# Altium PCB PC110.PcbDoc (part 15 of 24)
Units mm, origin at the board's own origin, x right, y up, seen from the top; angles counter-clockwise.
Board outline 150.05 x 107.35 mm, 10 copper layers (In2.Cu, F.Cu, B.Cu, In1.Cu, In3.Cu, In4.Cu, In5.Cu, In6.Cu, In7.Cu, In8.Cu); 936 components, 1434 nets, 4891 pads, 6088 vias.
Unrouted connection lines stored in the file: 2995.
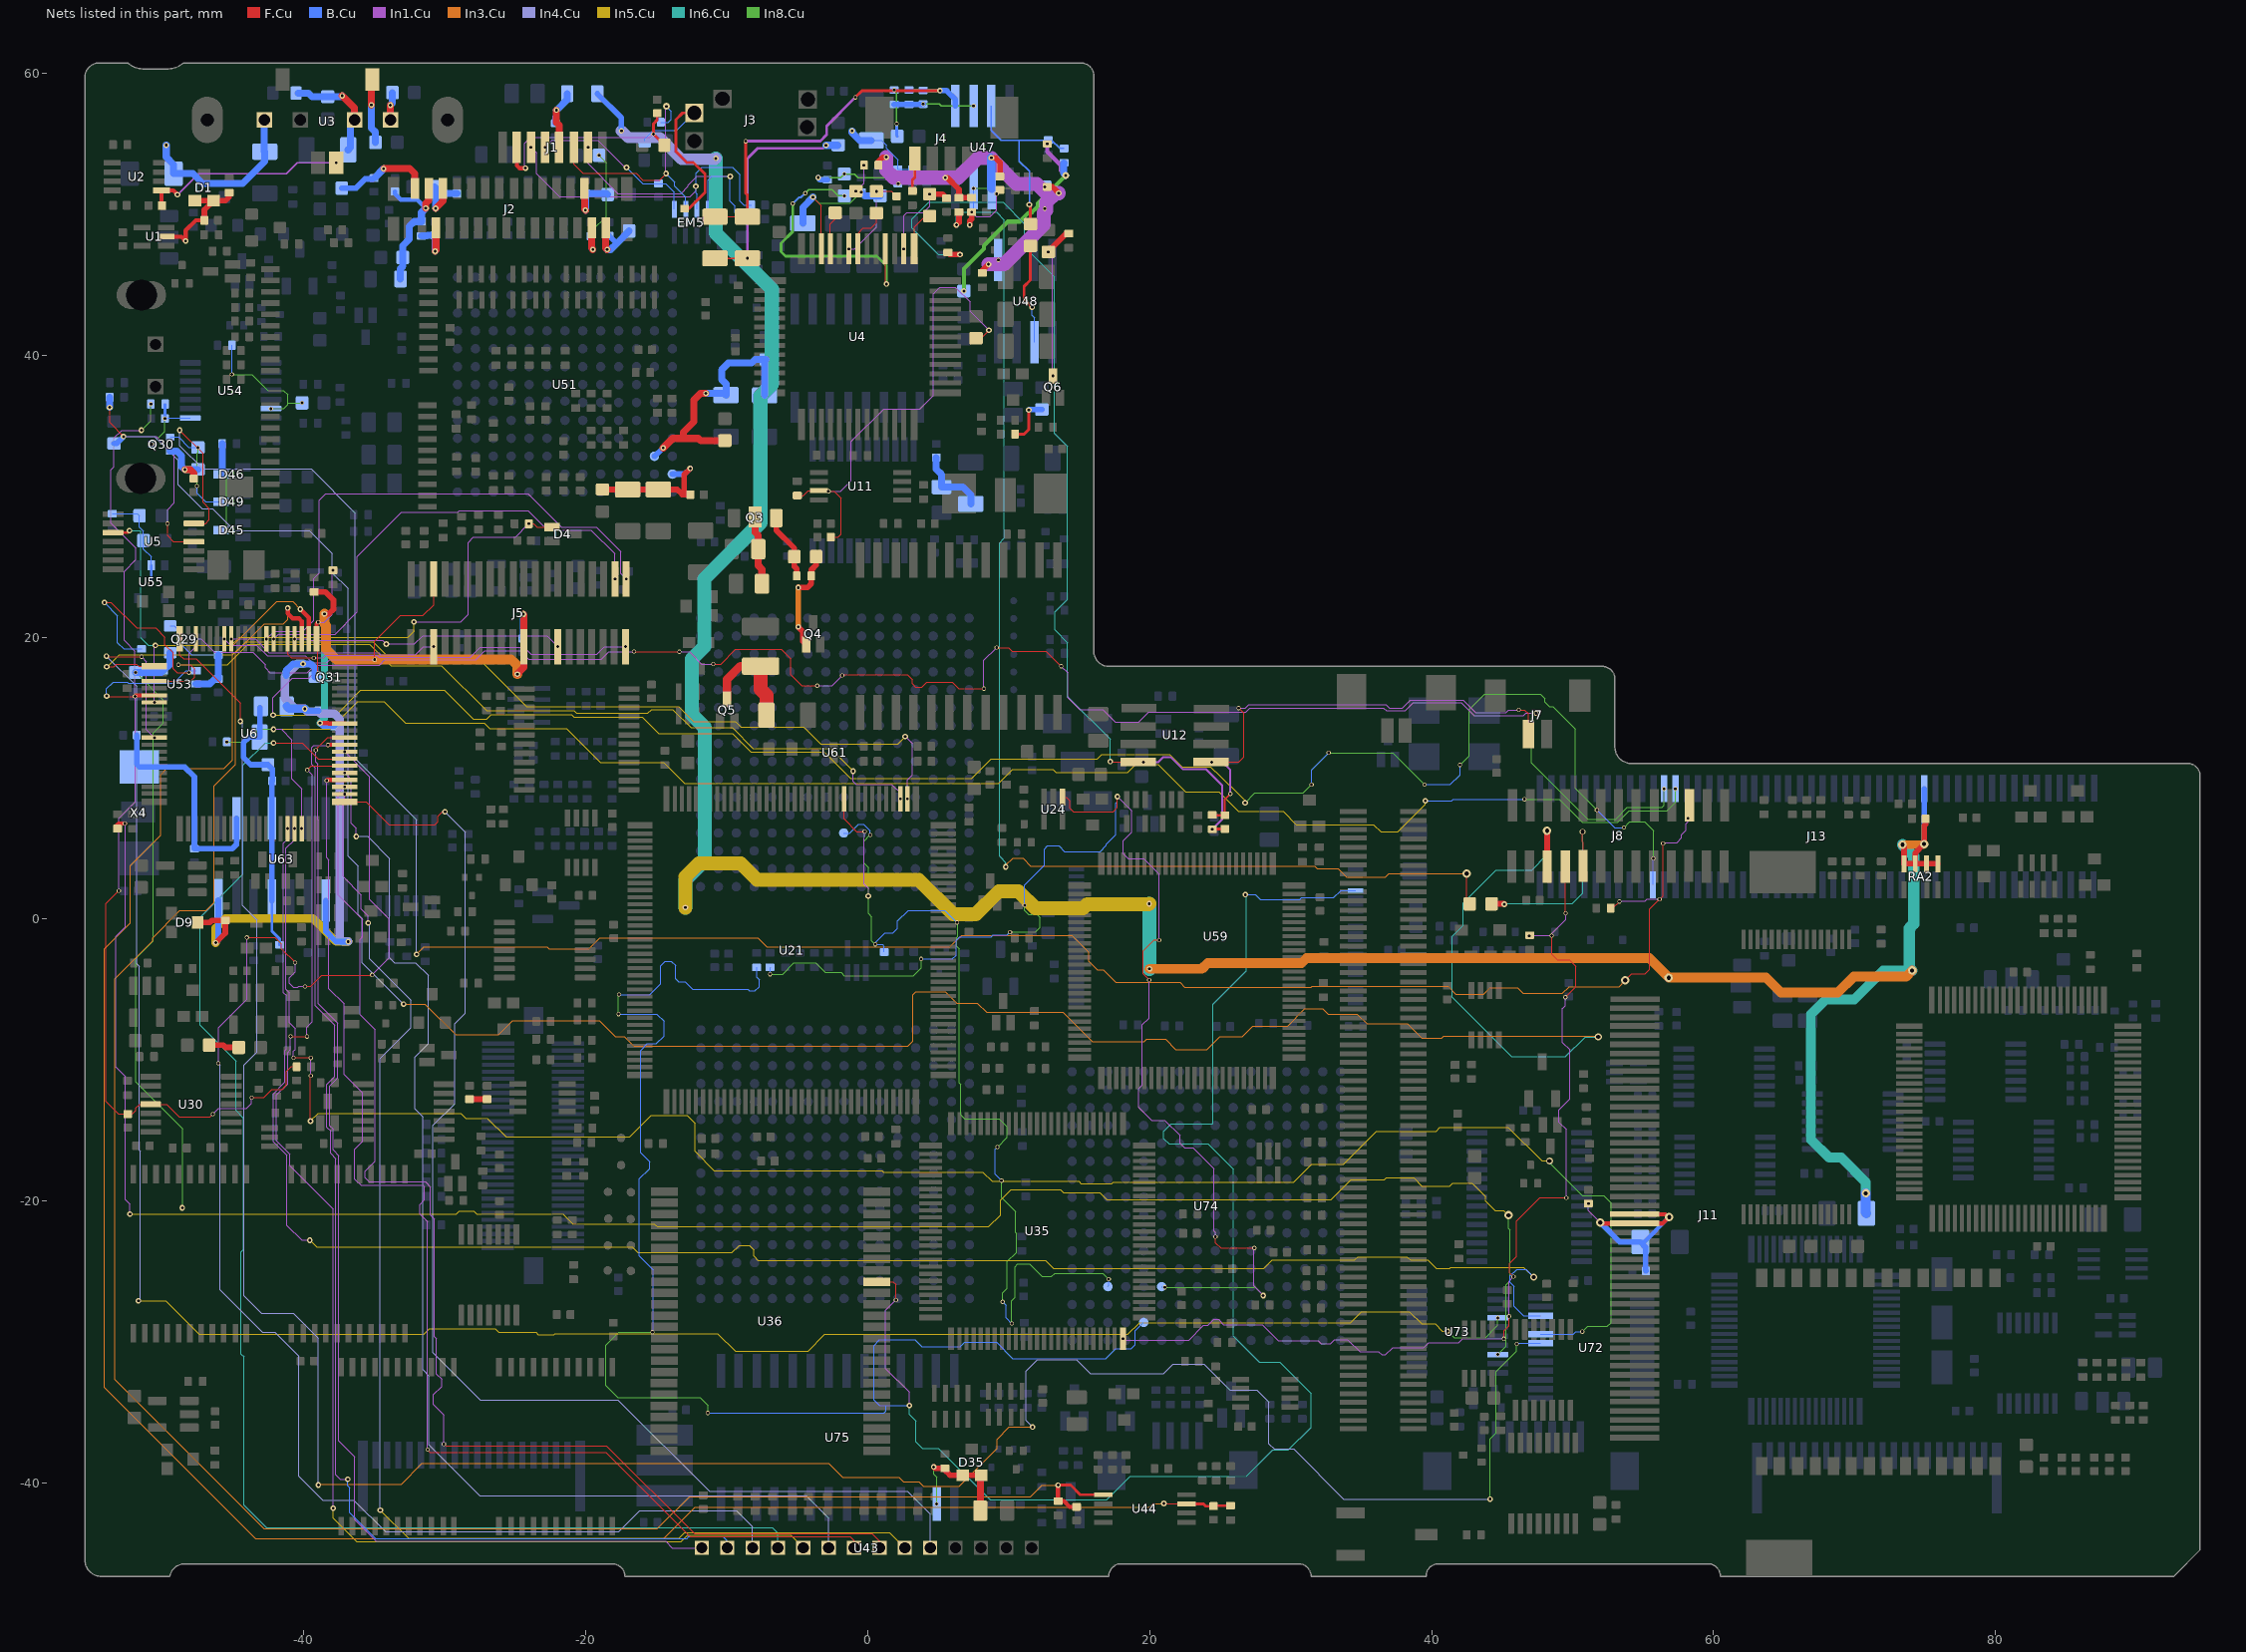
[diagram p22: the nets of this part, all layers, seen from the top]

## Via types
v1: diameter 0.3, hole 0.2, B.Cu to In8.Cu, tented both sides, 1934 vias
v2: diameter 0.4, hole 0.2, F.Cu to B.Cu, tented both sides, 1902 vias
v3: diameter 0.3, hole 0.2, F.Cu to In1.Cu, tented both sides, 1729 vias
v4: diameter 0.6, hole 0.3, F.Cu to B.Cu, tented both sides, 354 vias
v5: diameter 0.5, hole 0.3, F.Cu to B.Cu, tented both sides, 136 vias
v6: diameter 0.4, hole 0.2, B.Cu to In8.Cu, tented both sides, 12 vias
v7: diameter 0.3, hole 0.2, F.Cu to B.Cu, tented both sides, 6 vias
v8: diameter 0.6, hole 0.2, F.Cu to B.Cu, tented both sides, 4 vias
v9: diameter 0.5, hole 0.2, B.Cu to In8.Cu, tented both sides, 3 vias
v10: diameter 0.5, hole 0.2, F.Cu to B.Cu, tented both sides, 2 vias
v11: diameter 0.4, hole 0.3, F.Cu to B.Cu, tented both sides, 2 vias
v12: diameter 0.3, hole 0.2, F.Cu to In4.Cu, tented both sides, 2 vias
v13: diameter 0.6, hole 0.3, B.Cu to In8.Cu, tented both sides, 1 vias
v14: diameter 0.3, hole 0.2, F.Cu to In3.Cu, tented both sides, 1 vias

## Nets (pads, with @x,y where several pads share a name; then routed paths per layer and width w, separated by ;. In a path a pad name is that pad's centre, name@x,y a point inside that pad or via, vN(x,y) a via of type N, cw(c..) or ccw(c..) an arc to the next point about the centre after c; other vN are vias at no path point) (continued)
M38_P22_R88: R89.1 U73.8 | length 142
  F.Cu w0.3: R89.1@-53.22,6.43 -53.22,6.71 -53.14,6.79 v3(-52.7,6.79)
  F.Cu w0.4: R89.1@-53.17,6.46 R89.1@-53.15,6.48
  In1.Cu w0.08: v3(-52.7,6.79) -52.66,6.75 -52.66,-0.55 -53.34,-1.23 -53.34,-10.48 -52.65,-11.17 -52.65,-19.89 -52.33,-20.21 v2(-52.33,-20.92)
  In5.Cu w0.08: v2(-52.33,-20.92) -29.19,-20.92 -28.98,-20.71 -27.94,-20.71 -27.74,-20.91 -21.61,-20.91 -20.9,-21.62 -15.13,-21.62 -14.95,-21.8 8.59,-21.8 9.42,-20.97 9.42,-19.94 10.17,-19.19 13.66,-19.19 13.87,-19.4 16.47,-19.4 16.97,-19.9 32.87,-19.9 34.28,-18.49 36.64,-18.49 36.78,-18.35 38.72,-18.35 39.29,-18.92 41.29,-18.92 41.49,-18.72 42.86,-18.72 43.82,-19.68 43.82,-19.99 44.49,-20.66 45.11,-20.66 v4(45.45,-21)
  In8.Cu w0.08: v1(44.692,-30.875) 45.27,-30.298 45.27,-25.93 45.56,-25.64 45.56,-22.03 45.47,-21.94 45.47,-21.02 v4(45.45,-21)
M38_P27_KB_SPKDN: U6.31 U73.4 | length 156.5
  F.Cu w0.08: v2(-54,18.66) -53.95,18.61 v3(-51.51,18.61)
  In1.Cu w0.08: v3(-51.51,18.61) -51.16,18.26 -51.16,13.44 v3(-50.6,12.88)
  In4.Cu w0.08: v2(-54,18.66) -51.86,16.52 -51.86,-3.16 -51.67,-3.35 -51.67,-16.4 -51.6,-16.47 -51.6,-26.94 v2(-51.73,-27.07)
  In5.Cu w0.08: v2(-51.73,-27.07) -49.81,-27.07 -47.43,-29.45 -31.49,-29.45 -31.09,-29.05 -26.42,-29.05 -26.16,-29.31 -23.53,-29.31 -23.38,-29.46 -22.25,-29.46 -22.18,-29.39 -10.64,-29.39 -9.4,-30.63 -4.22,-30.63 -3.04,-29.45 18.45,-29.45 19.28,-28.62 34.24,-28.62 35.02,-27.84 38.43,-27.84 39.29,-28.7 40.24,-28.7 40.76,-29.22 v2(41.14,-29.22)
  In8.Cu w0.08: v2(41.14,-29.22) 41.59,-29.67 43.82,-29.67 44.692,-28.797 v1(44.692,-28.275)
M38_P34: J13.38 R356.1 U6.58 | length 120.6
  In1.Cu w0.08: v2(-42.15,13.47) -41.61,13.47 -40.86,12.72 -40.86,9.95 -40.15,9.24 v3(-40.15,6.43)
  In5.Cu w0.08: v2(-42.15,13.47) -38.12,13.47 -36.17,15.42 -34.32,15.42 -32.8,13.9 -27.2,13.9 -26.82,13.52 -21.36,13.52 -18.97,11.13 -14.49,11.13 -12.99,9.63 9.29,9.63 10.29,10.63 13.13,10.63 13.34,10.42 18.44,10.42 19,10.98 20.61,10.98 22.54,9.05 24.91,9.05 26.3,7.66 29.46,7.66 30.41,6.71 35.88,6.71 36.4,6.19 37.6,6.19 39.55,8.14 v2(39.55,8.4)
  In8.Cu w0.08: v1(-45.46,12.57) -44.1,12.57 -43.2,13.47 v2(-42.15,13.47) ; v1(46.58,8.51) 49.05,8.51 50.68,6.88 53.2,6.88 54.01,7.69 56.69,7.69 57.29,8.29 v1(57.29,9.25)
  B.Cu w0.08: v2(39.55,8.4) 41.41,8.4 41.52,8.51 v1(46.58,8.51)
M38_P35: U6.57 U72.20 | length 137.3
  F.Cu w0.08: v3(-40.73,-9.83) -39.52,-9.83 v3(-39.51,-9.84) ; v2(-39.53,-14.32) -39.53,-11.12 v3(-39.51,-11.1)
  In1.Cu w0.08: v3(-40.73,-9.83) -40.73,-9.37 -40.62,-9.26 -40.62,-7.75 -41.03,-7.34 -41.03,-5.21 -41.26,-4.98 -41.26,5.02 -40.65,5.63 v3(-40.65,6.43) ; v3(-39.51,-11.1) v3(-39.51,-9.84)
  In5.Cu w0.08: v2(-39.53,-14.32) -38.98,-13.77 -28.86,-13.77 -28.52,-14.11 -26.98,-14.11 -25.64,-15.45 -16.89,-15.45 -15.35,-13.91 -12.83,-13.91 -12.26,-14.48 -12.26,-16.47 -10.895,-17.835 0.995,-17.835 1.11,-17.95 8.17,-17.95 8.81,-18.59 14.96,-18.59 15.13,-18.76 17.31,-18.76 17.42,-18.65 30.21,-18.65 31.49,-17.37 33.75,-17.37 36.09,-15.03 40.31,-15.03 40.59,-14.75 45.43,-14.75 47.82,-17.14 v5(48.36,-17.14)
  In8.Cu w0.08: v5(48.36,-17.14) 48.36,-17.28 50.69,-19.61 52.21,-19.61 52.72,-20.12 52.72,-28.61 52.45,-28.88 51.06,-28.88 v1(50.69,-29.25)
  B.Cu w0.08: U72.20@47.73,-29.425 50.055,-29.425 50.23,-29.25 v1(50.69,-29.25)
M38_P36: U6.56 U72.22 | length 127.1
  In1.Cu w0.08: v3(-41.15,6.43) -41.15,5.68 -41.44,5.39 -41.44,-5.21 -41.25,-5.4 -41.25,-9.22 -41.35,-9.32 -41.35,-11.56 -42.17,-12.38 -42.17,-15.79 -41.21,-16.75 -41.21,-21.71 -40.15,-22.77 v2(-39.58,-22.77)
  In5.Cu w0.08: v2(-39.58,-22.77) -39.09,-23.26 -16.7,-23.26 -16.31,-23.65 -9.62,-23.65 -9.15,-23.18 -9.12,-23.18 -9.09,-23.15 -8.49,-23.15 -8.48,-23.14 -8.41,-23.14 -8.09,-23.46 -8.09,-23.88 -7.78,-24.19 12.6,-24.19 13.19,-24.78 28.08,-24.78 28.68,-24.18 34.52,-24.18 34.76,-23.94 38.25,-23.94 38.48,-24.17 39.73,-24.17 40.34,-24.78 41.27,-24.78 41.37,-24.68 46.53,-24.68 v5(47.24,-25.39)
  B.Cu w0.08: v5(47.24,-25.39) 46.69,-24.84 46.04,-24.84 45.57,-25.31 45.57,-25.77 45.84,-26.04 45.84,-27.458 46.507,-28.125 U72.22@47.73,-28.125
M38_P41: U6.23 U21.111 | length 62.1
  F.Cu w0.08: U6.23@-50.6,16.88 -48.06,16.88 -47.76,17.18 -47.76,17.75 -48.06,18.05 v7(-48.9,18.05)
  In1.Cu w0.08: v2(-1.04,10.5) -1.04,9.78 -0.83,9.57 1.7,9.57 2.32,8.95 v3(2.32,8.535)
  In5.Cu w0.08: v7(-48.9,18.05) -45.41,18.05 -43.95,19.51 -35.34,19.51 -33.82,17.99 -30.25,17.99 -27.04,14.78 -20.84,14.78 -20.67,14.61 -15.61,14.61 -15.34,14.88 -13.83,14.88 -12.53,13.58 -9.61,13.58 -8.13,12.1 -2.64,12.1 v2(-1.04,10.5)
M38_P43: U6.21 U21.110 | length 68.9
  F.Cu w0.08: v2(-53.99,17.91) -53.47,17.91 -53.3,18.08 -51.87,18.08 -51.72,17.93 U6.21@-50.6,17.93
  In1.Cu w0.08: v2(2.66,12.96) 3.17,12.45 3.17,10.22 2.82,9.87 v3(2.82,8.535)
  In5.Cu w0.08: v2(-53.99,17.91) -53.92,17.91 -53.09,18.74 -45.05,18.74 -44.11,19.68 -35.1,19.68 -33.86,18.44 -27.55,18.44 -24.19,15.08 -13.43,15.08 -12.37,14.02 -9.37,14.02 -8.99,13.64 -4.54,13.64 -3.33,12.43 2.13,12.43 v2(2.66,12.96)
M38_P44: U6.20 U72.19 | length 178.1
  F.Cu w0.08: U6.20@-48.8,19.88 -48.8,18.73 -48.54,18.47 -47.64,18.47 -44.5,15.33 v2(-44.5,14.04)
  In3.Cu w0.08: v2(-38.97,-40.13) -38.9,-40.06 -33.08,-40.06 -31.61,-38.59 -2.76,-38.59 -1.78,-39.57 2.22,-39.57 2.54,-39.89 3.62,-39.89 3.94,-40.21 6.49,-40.21 9.17,-37.53 9.17,-36.88 10.03,-36.02 v2(11.69,-36.02)
  In4.Cu w0.08: v2(-44.5,14.04) -44.35,13.89 -44.35,0.96 -43.34,-0.05 -43.34,-9.43 -44.25,-10.34 -44.25,-26.71 -43,-27.96 -40.74,-27.96 -38.97,-29.73 v2(-38.97,-40.13) ; v2(11.69,-36.02) 11.22,-35.55 11.22,-32.06 12.045,-31.235 14.805,-31.235 15.8,-32.23 20.98,-32.23 21.66,-31.55 23.85,-31.55 25.7,-33.4 27.61,-33.4 28.46,-34.25 28.46,-37.22 28.82,-37.58 30.21,-37.58 33.76,-41.13 v2(44.14,-41.13)
  In8.Cu w0.08: v2(44.14,-41.13) 44.14,-36.86 44.56,-36.44 44.56,-32.1 46.03,-30.63 v1(46.03,-30.13)
  B.Cu w0.08: v1(46.03,-30.13) 46.085,-30.075 U72.19@47.73,-30.075
M38_P46: J13.39 R288.2 U6.18 | length 140.9
  F.Cu w0.08: v2(-54.15,22.46) -54.14,22.47 -53.67,22.47 -51.85,20.65 -50.51,20.65 -49.85,19.99 -49.85,19.46 -49.28,18.89 -49.28,17.77 -49,17.49 v3(-48.14,17.49) ; v3(-16.57,18.98) -16.56,18.97 v3(-13.37,18.97) ; v3(-10.96,18.1) -10.42,18.1 -9.38,19.14 -6.14,19.14 -5.47,18.47 -5.47,17.34 -4.69,16.56 v3(-3.59,16.56) ; v3(-1.82,17.28) -1.75,17.35 2.8,17.35 3.16,16.99 3.16,16.69 3.38,16.47 3.85,16.47 4.18,16.8 6.01,16.8 6.46,16.35 v3(8.24,16.35) ; v3(9.14,19.26) 9.98,19.26 10.23,19.01 12.65,19.01 v3(13.72,17.94)
  In1.Cu w0.08: v3(-48.14,17.49) -48.14,18.86 -47.65,19.35 v3(-47.65,19.88) -47.29,19.88 -46.33,18.92 -43.62,18.92 -42.74,18.04 -42.74,17.82 -42.42,17.5 -39.74,17.5 -39.22,18.02 -34.63,18.02 -34.26,18.39 -27.81,18.39 -27.16,19.04 -24.67,19.04 -24.06,18.43 -18.9,18.43 -18.35,18.98 -16.63,18.98 v3@-16.59,19.02 ; v3(-13.37,18.97) -12.65,18.97 -11.78,18.1 v3(-10.96,18.1) ; v3(-3.59,16.56) -2.54,16.56 v3(-1.82,17.28) ; v3(8.24,16.35) 8.24,18.36 v3(9.14,19.26) ; v3(13.72,17.94) 14.19,17.47 14.19,15.73 15.06,14.86 16.68,14.86 17.57,13.97 19.22,13.97 19.93,14.68 26.81,14.68 27.11,14.98 36.59,14.98 36.79,14.78 38.12,14.78 38.71,15.37 42.09,15.37 43.02,14.44 46.5,14.44 46.69,14.63 47.38,14.63 v2(47.4,14.61)
  In8.Cu w0.08: v2(47.4,14.61) 47.07,14.28 47.07,11.1 51.08,7.09 53.04,7.09 53.87,7.92 56.33,7.92 56.49,8.08 v1(56.49,9.25)
  B.Cu w0.08: v2(-54.15,22.46) -53.22,21.53 -53.22,19.62 -52.77,19.17 R288.2@-51.5,19.17
M38_P52: J5.18 U6.14 | length 19.9
  F.Cu w0.08: v3(-34.98,18.41) -34.98,19.7 -33.14,21.54 -31.54,21.54 -30.78,22.3 J5.18@-30.78,24.13
  In1.Cu w0.08: v3(-45.65,19.88) -45.2,19.43 -43.35,19.43 -42.59,18.67 -39.89,18.67 -39.41,18.19 -38.37,18.19 -38.15,18.41 v3(-34.98,18.41)
M38_P53: J5.23 U6.13 | length 15.1
  In1.Cu w0.08: v3(-45.15,19.88) -43.44,19.88 -42.47,18.91 -34.68,18.91 -34.54,18.77 -32.08,18.77 -31.52,19.33 v3(-30.78,19.33)
M38_P60: J5.1 U6.8 | length 37.9
  In1.Cu w0.08: v3(-42.65,19.88) -42.1,20.43 -40.08,20.43 -39.31,21.2 -39.31,24.15 -38.92,24.54 -38.92,29.7 -38.46,30.16 -24.09,30.16 -21.74,27.81 -19.26,27.81 -17.53,26.08 -17.53,24.53 v3(-17.13,24.13)
M38_P61: J5.2 U6.7 | length 33.4
  In1.Cu w0.08: v3(-42.15,19.88) -41.81,20.22 -37.79,20.22 -36.21,21.8 -36.21,25.73 -33.06,28.88 -29.09,28.88 -28.98,28.99 -24.09,28.99 -22.71,27.61 -19.62,27.61 -17.93,25.92 v3(-17.93,24.13)
M38_P63: J5.40 U6.5 | length 26
  F.Cu w0.08: U6.5@-41.15,19.88 -41.15,18.79 -40.89,18.53 v3(-39.3,18.53)
  In1.Cu w0.08: v3(-39.3,18.53) -38.64,18.53 -38.45,18.72 -34.79,18.72 -34.66,18.59 -28.18,18.59 -27.47,19.3 -24.38,19.3 -23.88,18.8 -19.2,18.8 -18.67,19.33 v3(-17.18,19.33)
M38_P64: J5.34 U6.4 | length 19.4
  In1.Cu w0.08: v3(-40.65,19.88) -39.83,19.88 -39.73,19.78 -34.43,19.78 -34.17,19.52 v2(-34.15,19.52) -32.15,19.52 -31.56,20.11 -22.76,20.11 v3(-21.98,19.33)
M38_P65: C137.2 R214.2 U6.3 U44.1 | length 143.2
  F.Cu w0.2: v2(13.5,-40.14) 14.39,-40.14 15.07,-40.82 U44.1@16.71,-40.82
  F.Cu w0.3: v2(-41.14,22.07) -41.14,21.69 -40.79,21.34 -40.34,21.34 -40.15,21.15 U6.3@-40.15,19.88 ; v2(13.5,-40.14) R214.2@13.5,-41.27 13.92,-41.27 14.33,-41.68 C137.2@14.81,-41.68
  In3.Cu w0.08: v2(-41.14,22.07) -41.14,21.28 -41.46,20.96 -42.79,20.96 -44.85,18.9 -44.85,10.96 -46.35,9.46 -46.35,1.19 -46.94,0.6 -48.79,0.6 -50.73,-1.34 -50.73,-1.55 -53.4,-4.22 -53.4,-32.66 -42.82,-43.24 -14.92,-43.24 -12.64,-40.96 11.56,-40.96 12.37,-40.15 13.49,-40.15 v2(13.5,-40.14)
M38_P66: C138.2 R212.2 U6.2 U44.7 | length 152.9
  F.Cu w0.08: v2(21,-41.44) 21.03,-41.47 U44.7@22.61,-41.47
  F.Cu w0.2: U44.7@22.61,-41.47 23.82,-41.47 23.98,-41.63 C138.2@24.53,-41.63 24.56,-41.6 R212.2@25.73,-41.6
  F.Cu w0.3: v2(-40.25,21.99) -39.65,21.39 U6.2@-39.65,19.88
  In3.Cu w0.08: v2(-40.25,21.99) -40.79,22.53 -41.92,22.53 -45.05,19.4 -45.05,11.3 -45.67,10.68 -49.71,10.68 -50.14,10.25 -50.14,5.94 -52.29,3.79 -52.29,-0.25 -54.14,-2.1 -54.14,-33.23 -43.43,-43.94 -14.48,-43.94 -12.24,-41.7 19.96,-41.7 20.22,-41.44 v2(21,-41.44)
M38_P67: J13.61 R60.2 U6.1 | length 135.7
  F.Cu w0.08: U6.1@-39.1,19.88 -39,19.78 v3(-39,17.45)
  F.Cu w0.3: U6.1@-39.1,19.88 -39.1,20.95 v3(-38.98,21.07)
  In1.Cu w0.08: v2(-42.18,14.48) -42.18,15.73 -40.81,17.1 -39.65,17.1 -39.3,17.45 v3(-39,17.45) ; v3(-38.98,21.07) -38.54,21.07 -37.99,21.62 -37.99,24.69 v3(-37.93,24.75)
  In5.Cu w0.08: v2(-42.18,14.48) -37.71,14.48 -35.96,16.23 -30.02,16.23 -27.99,14.2 -27.03,14.2 -26.72,14.51 -21.02,14.51 -20.83,14.32 -15.98,14.32 -14.82,13.16 -9.58,13.16 -8.27,11.85 -3.08,11.85 -1.22,9.99 7.37,9.99 8.75,11.37 16.27,11.37 16.6,11.7 21.4,11.7 22.29,10.81 24.3,10.81 24.62,10.49 24.67,10.49 26.77,8.39 v2(26.77,8.26)
  In8.Cu w0.08: v2(26.77,8.26) 27.46,8.95 30.88,8.95 v1(31.48,9.55) ; v1(32.69,11.8) 37.24,11.8 39.49,9.55 v1(39.5,9.55) ; v1(42.01,10.94) 42.65,11.58 42.65,14.86 43.76,15.97 47.72,15.97 48.04,15.65 48.04,15.39 48.35,15.08 48.6,15.08 50.18,13.5 50.18,9.29 v1(51.72,7.75) ; v1(53.64,6.5) 54.04,6.9 55.1,6.9 55.73,6.27 v1(55.73,4.32)
  B.Cu w0.08: v1(31.48,9.55) 31.48,10.59 v1(32.69,11.8) ; v1(39.5,9.55) 41.31,9.55 42.01,10.25 v1(42.01,10.94) ; v1(51.72,7.75) 52.97,6.5 v1(53.64,6.5) ; J13.61@55.69,2.45 55.69,4.28 v1(55.73,4.32)
M38_P71: D4.2 R44.2 U5.3 U6.26 | length 50.1
  F.Cu w0.08: v3(-24.04,28.05) -23.71,28.05 -23.47,27.81 D4.2@-22.39,27.81
  F.Cu w0.2: U5.3@-53.533,27.42 -52.51,27.42 v2(-52.37,27.56)
  In1.Cu w0.08: v3(-50.6,15.38) -50.6,19.35 v2(-50.53,19.42) ; v2(-32.19,21.09) -28.87,21.09 -28.35,21.61 -28.35,26.72 -27.97,27.1 -24.99,27.1 v3(-24.04,28.05)
  In5.Cu w0.08: v2(-50.53,19.42) -45.15,19.42 -44.58,19.99 -32.63,19.99 -32.17,20.45 -32.19,20.47 v2(-32.19,21.09)
  In6.Cu w0.08: v2(-52.37,27.56) -51.65,27.56 -51.58,27.49 -51.58,19.97 -51.03,19.42 v2(-50.53,19.42)
M38_RESET: C99.2 R81.1 R282.2 U6.25 U30.4 U53.1 | length 81.5
  F.Cu w0.08: v2(-53.99,15.83) -53.96,15.8 v3(-51.98,15.8) ; v3(-53.12,2.02) -54.04,1.1 -54.04,-12.92 -53.14,-13.82 C99.2@-52.49,-13.82 -52.17,-13.82 -51.91,-13.56 -51.91,-13.4 -51.63,-13.12 U30.4@-50.86,-13.12 -49.73,-13.12 -48.83,-14.02 -46.65,-14.02 v3(-46.45,-13.82) ; v3(-43.7,-12.65) -42.84,-12.65 -42.25,-12.06 -41.53,-12.06 -41.23,-11.76 -41.23,-10.79 -40.9,-10.46 R81.1@-40.51,-10.46
  F.Cu w0.3: v3(-51.98,15.8) -51.9,15.88 U6.25@-50.6,15.88
  In1.Cu w0.08: v3(-53.12,2.02) -53.12,7.17 -51.95,8.34 -51.95,15.77 v3(-51.98,15.8) -51.98,19.02 -52.74,19.78 -52.74,24.66 -51.9,25.5 -51.9,26.31 -53.67,28.08 -53.67,31.89 -53.47,32.09 -53.47,34.12 -52.91,34.68 v2(-51.52,34.68) ; v3(-46.45,-13.82) -46.05,-13.42 -44.07,-13.42 -43.7,-13.05 v3(-43.7,-12.65)
  In8.Cu w0.08: v2(-51.52,34.68) -50.85,35.35 v1(-50.85,36.54)
  B.Cu w0.08: v2(-53.99,15.83) -53.99,16.34 -53.51,16.82 -52.52,16.82 -52.43,16.73 -49.24,16.73 -48.34,17.63 U53.1@-47.65,17.63
M38_SEG0: U6.70 U43.1 | length 84.1
  F.Cu w0.08: v3(-39.15,11.99) -39.15,12.05 -38.32,12.88 U6.70@-37.1,12.88
  In1.Cu w0.08: v3@-39.15,11.98 -39.15,11.15 -39,11 -39,7.04 -38.99,7.03 -38.99,-6 -37.61,-7.38 -37.61,-11.27 -38.17,-11.83 -38.17,-14.64 -37.925,-14.885 -37.925,-16.365 -37.53,-16.76 -37.53,-37 -36.39,-38.14 -36.39,-42.58 -34.86,-44.11 -14.35,-44.11 -13.87,-44.59 U43.1@-11.77,-44.59
M38_SEG1: U6.69 U43.2 | length 86.8
  F.Cu w0.3: v3(-38.29,12.35) -38.26,12.38 U6.69@-37.1,12.38
  In1.Cu w0.08: v3(-38.29,12.35) -38.33,12.31 -39.3,12.31 -39.44,12.17 -39.44,10.98 -39.19,10.73 -39.19,-6.12 -37.81,-7.5 -37.81,-11.16 -38.36,-11.71 -38.36,-14.75 -38.11,-15 -38.11,-16.61 -37.73,-16.99 -37.73,-39.4 -37.41,-39.72 v2(-36.88,-39.72)
  B.Cu w0.08: v2(-36.88,-39.72) -36.88,-40.19 -36.75,-40.32 -36.75,-42.09 -34.92,-43.92 -12.83,-43.92 -12.69,-43.78 -10.25,-43.78 -9.97,-44.06 U43.2@-9.97,-44.59
M38_SEG2: U6.68 U43.3 | length 108.4
  F.Cu w0.08: v3(-44.04,-1.3) -42.04,-1.3 -41.59,-1.75 -41.59,-2.1 v3(-40.62,-3.07) ; v3(-39.91,-4.77) -39.52,-4.77 -38.72,-3.97 -35.17,-3.97 v3(-35.15,-3.95)
  In1.Cu w0.08: v12(-46.06,-10.22) -46.06,-7.7 -44.04,-5.68 v3(-44.04,-1.3) ; v3(-40.62,-3.07) -40.62,-3.73 -41.04,-4.15 -41.04,-4.54 -40.74,-4.84 -40.44,-4.84 -40.37,-4.77 v3(-39.91,-4.77) ; v3(-37.1,11.88) -35.33,10.11 -35.33,1.39 -33.94,0 -33.94,-2.74 v3(-35.15,-3.95)
  In4.Cu w0.08: v12(-46.06,-10.22) -45.95,-10.33 -45.95,-25.68 -45.95,-26.29 -42.93,-29.31 -42.04,-29.31 -40.35,-31 -40.35,-39.5 -38.65,-41.2 -36.46,-41.2 -34.22,-43.44 -17.67,-43.44 -16.17,-41.94 -9.31,-41.94 -8.17,-43.08 U43.3@-8.17,-44.59
M38_SEG3: U6.67 U43.4 | length 103.3
  F.Cu w0.08: v2(-42.15,12.5) -40.1,12.5 -38.98,11.38 U6.67@-37.1,11.38
  In6.Cu w0.08: v2(-42.15,12.5) -42.73,12.5 -44.3,10.93 -44.3,3.19 -47.36,0.13 -47.36,-7.51 -44.82,-10.05 -44.82,-13.56 -44.27,-14.11 -44.27,-23.44 -44.44,-23.61 -44.44,-30.84 -44.26,-31.02 -44.26,-41.55 -42.65,-43.16 -6.75,-43.16 -6.37,-43.54 U43.4@-6.37,-44.59
M38_SEG4: U6.66 U43.5 | length 94
  F.Cu w0.08: v3(-40.94,-8.31) -39.79,-8.31 v3(-39.78,-8.32) ; v3(-39.76,10.58) -39.46,10.88 U6.66@-37.1,10.88
  In1.Cu w0.08: v3(-40.94,-8.31) -40.94,-9.25 -41.15,-9.46 -41.15,-11.67 -41.96,-12.48 -41.96,-15.72 -41,-16.68 -41,-17.47 -37.91,-20.56 v2(-37.91,-41.77) ; v3(-39.78,-8.32) -39.78,-7.64 -39.4,-7.26 -39.4,10.22 v3(-39.76,10.58)
  In5.Cu w0.08: v2(-37.91,-41.77) -37.91,-42.49 -36.25,-44.15 -13.23,-44.15 -12.77,-43.69 -5.47,-43.69 U43.5@-4.57,-44.59
  In6.Cu w0.08: U43.5@-4.58,-44.59 U43.5@-4.57,-44.59
M38_SEG5: U6.65 U43.6 | length 84.9
  In1.Cu w0.08: v3(-37.1,10.38) -36.63,9.91 -36.63,6.81 -36.28,6.46 v2(-36.28,5.87)
  In4.Cu w0.08: v2(-36.28,5.87) -35.48,5.87 -33.91,4.3 -33.91,-2.73 -33.55,-3.09 -32.07,-3.09 -31.18,-3.98 -31.18,-8.83 -32.12,-9.77 -32.12,-13.45 -31.56,-14.01 -31.56,-31.96 -31.13,-32.39 -31.13,-37.28 -27.52,-40.89 -4.35,-40.89 -2.77,-42.47 U43.6@-2.77,-44.59
M38_SEG6: U6.64 U43.7 | length 88.5
  F.Cu w0.08: v3(-31.22,-37.62) -31.04,-37.8 -18.59,-37.8 -12.59,-43.8 -1.24,-43.8 -0.97,-44.07 U43.7@-0.97,-44.59
  F.Cu w0.3: v3(-38.38,9.83) -38.33,9.88 U6.64@-37.1,9.88
  In1.Cu w0.08: v3(-38.38,9.83) -38.38,4.36 -38.22,4.2 -38.22,-4.94 -37.15,-6.01 -37.15,-11.01 -35.83,-12.33 -35.83,-15.74 -36.4,-16.31 -36.4,-18.43 -35.95,-18.88 -31.56,-18.88 -31.43,-19.01 -31.43,-19.89 -31.78,-20.24 -31.78,-20.9 -31.22,-21.46 v3(-31.22,-37.62)
M38_SEG7: U6.63 U43.8 | length 87.7
  F.Cu w0.08: v3(-30.07,-37.23) -30.03,-37.23 -29.91,-37.35 -18.53,-37.35 -12.29,-43.59 0.31,-43.59 0.83,-44.11 U43.8@0.83,-44.59
  In1.Cu w0.08: v3(-37.1,9.38) -37.55,8.93 -37.55,1.71 -35.82,-0.02 -35.82,-1.23 -36.01,-1.42 -36.01,-6.77 -34.94,-7.84 -34.94,-17.15 -35.65,-17.86 -35.65,-18.34 -35.36,-18.63 -31.39,-18.63 -31.03,-18.99 -31.03,-20.97 -30.73,-21.27 -30.73,-29.6 -30.59,-29.74 -30.59,-32.25 -30.21,-32.63 -30.21,-33.14 -30.8,-33.73 -30.8,-34.43 -30.07,-35.16 v3(-30.07,-37.23)
M38_SEG8: U6.62 U43.9 | length 92.4
  In1.Cu w0.08: v3(-37.1,8.88) -37.1,8.3 -37.22,8.18 -37.22,3.02 -35.92,1.72 -35.92,0.73 -35.43,0.24 v2(-35.43,-0.27)
  In4.Cu w0.08: v2(-35.43,-0.27) -35.34,-0.36 -35.34,-2.81 -32.4,-5.75 -32.4,-7.69 -34.58,-9.87 v2(-34.58,-41.91)
  In5.Cu w0.08: v2(-34.58,-41.91) -32.59,-43.9 -13.45,-43.9 -13.44,-43.89 -13.39,-43.89 -13,-43.5 1.54,-43.5 U43.9@2.63,-44.59
M38_SEG9: U6.61 U43.10 | length 90.7
  F.Cu w0.08: U6.61@-37.1,8.33 -35.58,8.33 -33.95,6.7 -30.71,6.7 -30.5,6.91 -30.5,7.29 -30.17,7.62 v2(-29.99,7.62)
  In4.Cu w0.08: v2(-29.99,7.62) -28.54,6.17 -28.54,-6.67 -29.29,-7.42 -29.29,-13.09 -30.83,-14.63 -30.83,-30.74 -27.48,-34.09 -17.72,-34.09 -11.22,-40.59 2.82,-40.59 4.43,-42.2 U43.10@4.43,-44.59
M38_VREF: C216.1 C223.2 J5.31 R41.1 U6.72 | length 37.3
  F.Cu w0.3: v2(-38.85,13.91) -38.27,13.91 -38.24,13.88 U6.72@-37.1,13.88
  F.Cu w0.4: R41.1@-39.27,23.21 -38.47,23.21 -37.9,22.64 -37.9,21.97 -38.21,21.66 v2(-38.53,21.66)
  F.Cu w0.5: v2(-24.85,17.38) -24.85,17.4 -24.38,17.87 J5.31@-24.38,19.33 -24.38,21.6 v2(-24.42,21.64)
  In3.Cu w0.7: v2(-38.53,21.66) -38.53,20.95 -38.41,20.83 -38.43,20.81 -38.43,19.14 -37.7,18.41 -25.27,18.41 -24.85,17.99 v2(-24.85,17.38)
  In6.Cu w0.5: v2(-38.85,13.91) -38.53,14.23 v2(-38.53,21.66)
  B.Cu w0.4: v2(-38.85,13.91) -38.63,13.69 C223.2@-37.83,13.69
  B.Cu w0.5: C216.1@-24.46,19.91 -24.42,19.95 v2(-24.42,21.64)
MEMCS16#: R316.2 U21.119 U61.J13 U74.D3 | length 72.6
  F.Cu w0.08: U21.119@-1.68,8.535 -1.68,7.11 -0.79,6.22 v3(-0.22,6.22)
  In1.Cu w0.08: v3(-0.22,6.22) -0.22,5.8 -0.26,5.76 -0.26,2.49 0.04,2.19 v2(0.04,1.64)
  In8.Cu w0.08: v1(0.18,5.98) -0.26,5.54 -0.26,3.96 0.04,3.66 v2(0.04,1.64) 0.04,0.4 0.28,0.16 0.28,-1.54 0.52,-1.78 v1(0.53,-1.78) ; v1(6.33,-0.23) 6.39,-0.29 6.39,-1.23 6.32,-1.3 6.32,-1.92 6.5,-2.1 6.5,-11.62 6.59,-11.71 6.59,-13.87 6.88,-14.16 9.33,-14.16 9.88,-14.71 9.88,-15.48 v1(9.2,-16.16) ; v1(9.49,-18.54) 9.49,-19.74 10.47,-20.72 10.47,-22.24 10.54,-22.31 10.54,-23.64 9.89,-24.29 9.89,-26.19 9.57,-26.51 v1(9.57,-27.14) ; v1(10.22,-28.68) 10.21,-28.67 10.21,-27.07 10.45,-26.83 10.45,-24.65 10.64,-24.46 11.47,-24.46 12.36,-25.35 13.04,-25.35 13.28,-25.11 16.67,-25.11 v1(17.09,-25.53)
  B.Cu w0.08: U61.J13@-1.71,6.11 -1.29,6.11 -0.65,6.75 -0.28,6.75 0.18,6.29 v1(0.18,5.98) ; R316.2@1.17,-2.33 1.17,-1.92 1.03,-1.78 v1(0.53,-1.78) 0.53,-1.69 1.24,-0.98 1.78,-0.98 2.12,-0.64 2.12,-0.13 2.88,0.63 5.47,0.63 v1(6.33,-0.23) ; v1(9.2,-16.16) 9.05,-16.31 9.05,-18.1 v1(9.49,-18.54) ; v1(9.57,-27.14) 9.81,-27.38 9.81,-28.27 v1(10.22,-28.68) ; U74.D3@17.03,-26.04 17.09,-25.98 v1(17.09,-25.53)
MEMR#: R322.1 U36.16 U59.24 U74.B5 | length 202.6
  F.Cu w0.08: U36.16@0.63,-25.71 1.8,-25.71 2,-25.91 v3(2,-27.01)
  In1.Cu w0.08: v3(2,-27.01) 1.27,-27.74 1.27,-31.86 2.96,-33.55 v2(2.96,-34.49)
  In6.Cu w0.08: v2(2.96,-34.49) 2.96,-35.11 3.42,-35.57 3.42,-37.06 3.89,-37.53 5.01,-37.53 8.67,-41.19 16.94,-41.19 18.62,-39.51 26.87,-39.51 28.74,-37.64 29.84,-37.64 31.44,-36.04 31.44,-33.64 29.21,-31.41 27.76,-31.41 25.93,-29.58 25.93,-17.72 24.15,-15.94 21.36,-15.94 20.99,-15.57 20.99,-15.05 21.51,-14.53 24.44,-14.53 24.5,-14.47 24.5,-6.02 26.85,-3.67 26.85,1.68 v2(26.79,1.74)
  In8.Cu w0.08: v1(-17.68,-6.73) -17.68,-5.38 v1(-17.64,-5.34) ; v1(-15.27,-29.29) -17.66,-29.29 -18.57,-30.2 -18.57,-33.09 -17.73,-33.93 -11.9,-33.93 -11.34,-34.49 v1(-11.34,-35.02)
  B.Cu w0.08: v1(-17.68,-6.73) -14.96,-6.73 -14.45,-7.24 -14.45,-8.3 -14.99,-8.84 -15.64,-8.84 -16.1,-9.3 -16.1,-16.58 -15.47,-17.21 -15.47,-17.68 -16.21,-18.42 -16.21,-23.87 -15.2,-24.88 -15.2,-29.22 v1(-15.27,-29.29) ; v1(-17.64,-5.34) -15.45,-5.34 -14.68,-4.57 -14.68,-3.3 -14.37,-2.99 -13.93,-2.99 -13.64,-3.28 -13.64,-4.23 -13.42,-4.45 -12.94,-4.45 -12.43,-4.96 -8.5,-4.96 -8.38,-5.08 -7.99,-5.08 -7.69,-4.78 -7.69,-4.31 -7.88,-4.12 R322.1@-7.88,-3.42 ; v1(-11.34,-35.02) 1.17,-35.02 1.3,-34.89 1.3,-34.49 1.32,-34.49 ; v2(2.96,-34.49) 1.32,-34.49 ; U74.B5@19.57,-28.58 18.96,-29.19 18.96,-30.17 18.68,-30.45 17.58,-30.45 16.87,-31.16 10.29,-31.16 9.14,-30.01 6.87,-30.01 6.55,-30.33 3.83,-30.33 3.34,-29.84 0.83,-29.84 0.43,-30.24 0.43,-34.1 0.82,-34.49 1.32,-34.49 ; v2(26.79,1.74) 27.5,1.74 27.86,1.38 30.63,1.38 30.79,1.54 33.06,1.54 33.56,2.04 U59.24@34.59,2.04
MEMW#: R324.1 U24.1 U74.D6 | length 96.5
  F.Cu w0.08: U24.1@13.81,8.65 14.11,8.65 14.35,8.41 14.35,7.87 14.59,7.63 17.42,7.63 17.71,7.92 v2(17.71,8.7) ; v3(19.96,-4.31) 19.54,-3.89 19.54,-2.25 20.31,-1.48 v3(20.67,-1.48) ; v3(24.67,-22.53) 24.67,-22.95 25.04,-23.32 v3(27.42,-23.32)
  In1.Cu w0.08: v2(17.71,8.7) 18.71,7.7 18.71,6.18 18.11,5.58 18.11,4.66 18.46,4.31 19.56,4.31 20.67,3.2 v3(20.67,-1.48) ; v3(19.96,-4.31) 19.96,-7.01 19.48,-7.49 19.48,-11.75 19.23,-12 19.23,-13.34 20.14,-14.25 21.07,-14.25 22.16,-15.34 22.16,-15.89 22.48,-16.21 23.08,-16.21 24.55,-17.68 24.55,-22.1 24.67,-22.22 v3(24.67,-22.53) ; v3(27.42,-23.32) 27.37,-23.37 27.37,-26.01 v2(28.05,-26.69)
  In8.Cu w0.08: v1(-6.92,-3.9) -6.04,-3.9 -5.24,-3.1 -3.69,-3.1 -3.02,-3.77 -1.9,-3.77 -1.66,-4.01 3.24,-4.01 3.79,-3.46 v1(3.79,-2.82) ; v1(10.09,-0.92) 11.9,-0.92 12.22,-0.6 12.22,0.12 11.99,0.35 11.4,0.35 11.13,0.62 v1(11.13,0.98) ; v1(21.07,-26.11) 27.5,-26.11 28.05,-26.66 v2(28.05,-26.69)
  B.Cu w0.08: R324.1@-6.94,-3.42 -6.92,-3.44 v1(-6.92,-3.9) ; v1(3.79,-2.82) 6.01,-2.82 6.28,-2.55 6.28,-1.52 6.54,-1.26 8.76,-1.26 8.9,-1.12 9.89,-1.12 v1(10.09,-0.92) ; v1(11.13,0.98) 11.13,2.43 12.52,3.82 12.52,4.97 12.75,5.2 13.55,5.2 13.95,4.8 16.48,4.8 16.92,5.24 16.92,5.31 17.61,6 17.61,8.23 17.71,8.33 v2(17.71,8.7) ; U74.D6@20.84,-26.07 20.88,-26.11 v1(21.07,-26.11) 20.91,-26.11 U74.D6@20.84,-26.04
MIC_in_pin: C6.2 J3.4 L13.2 | length 14.2
  F.Cu w0.2: C6.2@-12.99,50.4 -12.68,50.4 -11.54,51.54 -11.54,52.85 -12.37,53.68 -12.83,53.68 -13.62,54.47 -13.62,56.7 -13.13,57.19 J3.4@-12.3,57.19
  B.Cu w0.08: L13.2@-15.817,55.2 -15.817,55.363 -15.23,55.95 -13.54,55.95 J3.4@-12.3,57.19
MIC_J17: J4.1 R30.2 | length 2.4
  F.Cu w0.2: R30.2@3.17,51.65 3.17,52.43 3.34,52.6 J4.1@3.34,53.95
MN192_VSEN#: C226.2 J8.16 R277.2 U5.11 | length 195.2
  F.Cu w0.08: v2(-53.77,36.3) -53.77,35.22 -52.79,34.24 v2(-52.79,34.23) ; v3(-49.67,28.06) -49.67,27.19 -49.25,26.77 U5.11@-47.807,26.77
  F.Cu w0.4: J8.16@48.19,3.73 v4(48.19,6.28)
  In1.Cu w0.08: v2(-52.79,34.23) -50.48,34.23 -49.2,32.95 -49.2,29.53 -49.67,29.06 v3(-49.67,28.06)
  In3.Cu w0.08: v2(-32.92,-6.02) -31.4,-6.02 -29.23,-8.19 -26.18,-8.19 -25.18,-7.19 -19.02,-7.19 -17.89,-8.32 -17.27,-8.32 -16.58,-9.01 2.85,-9.01 3.21,-8.65 3.21,-5.34 3.41,-5.14 5.49,-5.14 6.3,-5.95 7.77,-5.95 8.42,-6.6 13.86,-6.6 15.93,-8.67 19.61,-8.67 19.78,-8.5 21.12,-8.5 21.85,-9.23 24.07,-9.23 24.99,-8.31 26.57,-8.31 27.31,-7.57 29.78,-7.57 31.01,-6.34 32.27,-6.34 32.66,-6.73 34.71,-6.73 35.4,-7.42 38.28,-7.42 39.29,-8.43 40.71,-8.43 40.86,-8.28 51.75,-8.28 v5(51.82,-8.35)
  In4.Cu w0.08: v2(-52.79,34.23) -50.62,34.23 -48.92,32.53 -48.92,30.81 -47.23,29.12 -46.47,29.12 -44.92,27.57 -39.61,27.57 -37.97,25.93 -37.97,24.55 -36.87,23.45 -36.87,4.46 -36.16,3.75 -36.16,0.35 -35.85,0.04 -35.85,-3.09 v2(-32.92,-6.02)
  In6.Cu w0.08: v4(48.19,6.28) 48.19,4.56 47.11,3.48 44.56,3.48 42.24,1.16 42.24,-0.44 41.47,-1.21 41.47,-5.55 45.66,-9.74 49.5,-9.74 50.89,-8.35 v5(51.82,-8.35)
  B.Cu w0.4: C226.2@-53.46,33.745 -53.275,33.745 v2(-52.79,34.23)
  B.Cu w0.5: v2(-53.77,36.3) R277.2@-53.77,37.03
MN195_U1RD#: J8.3 R128.2 U5.13 | length 166
  F.Cu w0.08: v2(-48.8,34.68) -47.16,33.04 -47.16,29.57 -46.72,29.13 -46.72,28.32 -46.97,28.07 U5.13@-47.807,28.07 ; R128.2@52.7,0.79 52.86,0.79 v3(53.33,1.26) ; v4(53.73,-4.34) 54.19,-3.88 55.15,-3.88 55.47,-3.56 55.47,0.72 v3(56.17,1.42) 56.41,1.66 v3(56.41,5.38) ; v3(58.18,7.16) 58.18,7.97 J8.3@58.29,8.08
  In1.Cu w0.08: v3(53.33,1.26) 53.36,1.29 55.15,1.29 55.28,1.42 v3(56.17,1.42) ; v3(56.41,5.38) 56.46,5.43 57.39,5.43 57.73,5.77 57.73,6 58.03,6.3 58.03,6.77 58.18,6.92 v3(58.18,7.16)
  In3.Cu w0.08: v2(-32,-2.49) -31.49,-1.98 -22.74,-1.98 -22.61,-2.11 -19.77,-2.11 -19,-1.34 -7.81,-1.34 -7.17,-1.98 5.83,-1.98 6.66,-1.15 14.47,-1.15 15.68,-2.36 15.68,-2.99 16.28,-3.59 16.71,-3.59 17.6,-4.48 22.14,-4.48 22.47,-4.81 31.47,-4.81 31.52,-4.76 41.17,-4.76 41.72,-5.31 43.68,-5.31 44.14,-4.85 46.08,-4.85 46.49,-5.26 49.27,-5.26 49.75,-4.78 53.29,-4.78 v4(53.73,-4.34)
  In4.Cu w0.08: v2(-48.8,34.68) -48.8,33.57 -47.16,31.93 -39.47,31.93 -36.35,28.81 -36.35,11.4 -32,7.05 v2(-32,-2.49)
Modem_Audio_Out: C89.1 R32.1 | length 87.5
  F.Cu w0.08: v4(42.49,3.24) 42.5,3.23 42.5,1.285 C89.1@42.695,1.09
  F.Cu w0.4: v2(6.29,49.24) 6.47,49.42 R32.1@6.47,50.15
  In3.Cu w0.08: v2(9.79,3.71) 9.79,3.82 10.31,4.34 11,4.34 11.56,3.78 31.69,3.78 31.89,3.58 33.37,3.58 33.97,2.98 36.71,2.98 36.97,3.24 v4(42.49,3.24)
  In6.Cu w0.08: v2(6.29,49.24) 6.29,49.8 6.65,50.16 9.13,50.16 9.69,49.6 9.69,27.03 9.34,26.68 9.34,4.47 9.79,4.02 v2(9.79,3.71)
Modem_VSDA#: J8.17 R127.1 U35.75 | length 70.6
  F.Cu w0.08: v3(45.12,-29.76) 45.12,-29.19 45.49,-28.82 v3(45.49,-28.17) ; v3(45.81,-25.35) 45.53,-25.07 45.53,-24.4 46.01,-23.92 46.01,-21.41 47.68,-19.74 49.54,-19.74 v3(49.56,-19.76) ; v3(46.91,-1.18) R127.1@46.95,-1.14 ; v3(48.52,-1.16) 48.52,-2.5 48.91,-2.89 49.78,-2.89 50.24,-3.35 50.24,-4.78 v3(49.49,-5.53) ; J8.17@49.49,3.73 49.49,0.45 v3(49.51,0.43)
  In1.Cu w0.08: v3(18.11,-29.75) 18.22,-29.86 22.78,-29.86 23.83,-28.81 24.13,-28.81 24.55,-28.39 24.86,-28.39 25.22,-28.75 27.99,-28.75 29.13,-29.89 31.95,-29.89 32.16,-30.1 32.84,-30.1 33.12,-29.82 34.05,-29.82 34.91,-30.68 36.24,-30.68 36.46,-30.9 36.72,-30.9 37.24,-30.38 39.45,-30.38 39.78,-30.05 41.91,-30.05 42.2,-29.76 v3(45.12,-29.76) ; v3(45.49,-28.17) 45.49,-25.67 v3(45.81,-25.35) ; v3(46.91,-1.18) 46.93,-1.16 v3(48.52,-1.16) 48.52,-1.01 49.51,-0.02 v3(49.51,0.43) ; v3(49.49,-5.53) 49.49,-6.13 49.3,-6.32 49.29,-6.32 49.29,-8.74 49.81,-9.26 49.81,-12.74 49.04,-13.51 49.04,-14.41 49.54,-14.91 49.54,-19.74 v3(49.56,-19.76)
Net-(C1--): C1.2 U2.1 U3.1 | length 14.6
  F.Cu w0.1: U3.1@-37.8,53.65 v3(-37.7,53.65)
  F.Cu w0.3: C1.2@-50.06,50.61 -50.09,50.64 U2.1@-50.09,51.69 -49.26,51.69 v2(-48.96,51.39)
  In1.Cu w0.1: v2(-48.96,51.39) -47.46,52.89 -41.235,52.89 -40.475,53.65 v3(-37.7,53.65)
Net-(C4-+): C4.1 D1.1 D1.3 R4.1 U1.2 | length 8.4
  F.Cu w0.3: U1.2@-49.76,48.41 -48.69,48.41 v2(-48.38,48.1) -48.38,48.85 -47.66,49.57 C4.1@-47.05,49.57
  F.Cu w0.4: D1.3@-47.73,50.955 D1.1@-46.405,50.955 ; C4.1@-47.05,49.57 -47.05,50.31 D1.1@-46.405,50.955 ; R4.1@-45.3,51.53 -45.3,51.22 -45.565,50.955 D1.1@-46.405,50.955
Net-(C7-+): C7.1 J1.7 L1.2 | length 15.9
  F.Cu w0.2: C7.1@-14.93,57.17 -14.93,56.69 -15.21,56.41 v3(-15.21,55.688) L1.2@-14.423,54.9
  F.Cu w0.3: J1.7@-24.89,54.75 -24.89,53.46 -24.7,53.27 v2(-24.28,53.27)
  In1.Cu w0.08: v2(-24.28,53.27) -24.33,53.32 -24.33,55.04 -23.91,55.46 -15.438,55.46 v3(-15.21,55.688)
Net-(C10-+): C10.1 C23.1 L7.1 | length 16.2
  F.Cu w0.1: C10.1@-10.84,46.875 v3(-8.54,46.875)
  In1.Cu w0.1: v3(-8.54,46.875) v3@-8.53,46.885
  In1.Cu w0.2: v3@-8.53,46.885 -8.53,53.96 -7.81,54.68 -3.17,54.68 v2(-2.96,54.89)
  B.Cu w0.1: L7.1@-2.113,54.89 L7.1@-2.1,54.903
  B.Cu w0.5: v2(-2.96,54.89) L7.1@-2.113,54.89
Net-(C10--): C10.2 C23.2 C154.2 R227.2 U47.1 | length 27.4
  F.Cu w0.08: C10.2@-10.84,49.825 C23.2@-8.54,49.825
  F.Cu w0.2: v3(-8.65,55.18) -8.66,55.17 -8.66,51.48 -8.54,51.36 C23.2@-8.54,49.825 ; v3(-0.88,58.29) -0.4,58.77 v2(5.12,58.77)
  In1.Cu w0.2: v3(-8.65,55.18) -8.64,55.19 -3.36,55.19 -2.91,55.64 -2.91,56.26 v3(-0.88,58.29)
  B.Cu w0.2: R227.2@2.93,58.81 2.96,58.78 C154.2@3.93,58.78 3.94,58.77 v2(5.12,58.77)
  B.Cu w0.4: v2(5.12,58.77) 5.59,58.77 6.21,58.15 U47.1@6.21,57.68
Net-(C11-+): C11.1 C50.2 R72.1 U11.7 | length 32.9
  F.Cu w0.08: R72.1@-5,30.05 -4.57,30.05 -4.23,30.39 U11.7@-3.46,30.39 -3.42,30.35 v3(-2.78,30.35) -2.4,30.35 -1.9,29.85 -1.9,27.3 -2.1,27.1 C50.2@-2.62,27.1 ; C11.1@7.68,41.205 8.035,41.205 v2(8.6,41.77)
  In1.Cu w0.08: v3(-2.78,30.35) -1.91,30.35 -1.17,31.09 -1.17,33.89 1.14,36.2 3.7,36.2 4.64,37.14 4.64,44.37 5.1,44.83 6.22,44.83 7.27,43.78 7.27,43.1 v2(8.6,41.77)
Net-(C12-+): C12.1 U4.1 | length 3
  F.Cu w0.08: U4.1@3.3,47.54 3.3,49.09 4.08,49.87 C12.1@4.39,49.87
Net-(C12--): C12.2 C24.2 U4.2 | length 6.6
  F.Cu w0.4: v3(4.39,51.42) 5.31,51.42 C24.2@5.59,51.14
  In1.Cu w0.08: v3(2.55,47.54) 2.55,49.9 2.78,50.13 3.95,50.13 4.39,50.57 v3(4.39,51.42)
Net-(C13-+): C13.1 U48.6 | length 7.3
  F.Cu w0.2: C13.1@11.54,47.755 11.54,45.33 11.09,44.88 11.09,43.97 v2(11.66,43.4)
  B.Cu w0.08: v2(11.66,43.4) 11.66,42.84 11.845,42.655 U48.6@11.845,40.91
Net-(C13--): C13.2 R217.2 R218.2 U47.3 | length 13.7
  F.Cu w0.1: v2(11.46,50.68) v2@11.54,50.6
  F.Cu w0.2: C13.2@11.54,49.305 v2@11.54,50.6
  B.Cu w0.1: U47.3@8.76,57.68 8.76,55.95 9.45,55.26 10.72,55.26 ; v2(11.46,50.68) 11.46,53.04 10.74,53.76 10.74,55.24 10.72,55.26 ; R217.2@13.92,54.66 13.62,54.66 13.02,55.26 R218.2@12.8,55.26 10.72,55.26
Net-(C15--): C15.2 R25.2 R26.2 R32.2 R34.2 R35.2 U47.6 | length 32.4
  F.Cu w0.4: R34.2@0.75,53.48 0.75,53.73 1.07,54.05 v2(1.32,54.05) ; v2(5.5,52.59) 5.64,52.59 6.47,51.76 R32.2@6.47,51.17 R25.2@7.37,51.17 ; R26.2@8.13,45.84 8.13,46.01 v2(8.57,46.45) ; v2(8.77,54) 9.05,54 9.38,53.67 C15.2@9.38,52.68 ; R35.2@12.73,51.94 13.11,51.94 v2(13.55,51.5)
  In1.Cu w1: v2(1.32,54.05) 1.32,53.13 1.86,52.59 v2(5.5,52.59) 6.4,52.59 7.81,54 v2(8.77,54) 8.77,53.94 10.55,52.16 12,52.16 12.66,51.5 v2(13.55,51.5) 13.34,51.5 12.67,50.83 12.67,50.27 12.49,50.09 12.49,49.27 9.67,46.45 v2(8.57,46.45)
  B.Cu w0.6: v2(8.77,54) 8.77,51.855 U47.6@8.795,51.83
Net-(C18--): C18.2 R34.1 | length 2.1
  In1.Cu w0.08: v3(-0.84,51.635) -0.27,52.205 v3(-0.27,53.48)
Net-(C20--): C20.2 C21.2 U4.8 | length 6.7
  F.Cu w0.08: v3(0.62,51.63) 1.69,51.63 C20.2@2.04,51.28
  In1.Cu w0.08: v3(-1.35,47.54) -0.92,47.54 0.62,49.08 v3(0.62,51.63)
Net-(C21-+): C21.1 U4.7 | length 3.4
  F.Cu w0.08: U4.7@-0.7,47.54 -0.7,48.64 -0.32,49.02 0.22,49.02 0.62,49.42 C21.1@0.62,50.08
Net-(C22-+): C22.1 U4.10 | length 2.7
  F.Cu w0.08: U4.10@-2.65,47.54 -2.65,49.31 -2.31,49.65 C22.1@-2.31,50.105
Net-(C25-+): C25.1 Q6.3 R36.2 | length 11
  F.Cu w0.08: v3(12.81,47.325) C25.1@12.945,47.325
  F.Cu w0.4: C25.1@12.945,47.325 12.945,47.495 14.09,48.64 R36.2@14.26,48.64
  In1.Cu w0.08: v3(12.81,47.325) 13.12,47.015 13.12,38.55 v3(13.14,38.53)
Net-(C30--): C30.2 C36.2 C48.1 L3.2 U51.N12 | length 9.9
  F.Cu w0.4: L3.2@-18.81,30.477 -18.808,30.475 C30.2@-17.03,30.475 C36.2@-14.86,30.475 -13.525,30.475 -13.16,30.11 -13.02,30.11 ; v2(-12.59,31.97) -13.02,31.54 -13.02,30.11 ; C48.1@-12.58,30.11 -13.02,30.11
  B.Cu w0.4: U51.N12@-13.86,31.57 -12.99,31.57 v2(-12.59,31.97)
Net-(C46-+): C46.1 Q3.3 R76.1 | length 4.7
  F.Cu w0.4: Q3.3@-6.493,28.45 -6.492,27.593 -5.205,26.305 C46.1@-5.205,25.71 -5.205,25.025 -5.03,24.85 R76.1@-5.03,24.35
Net-(C46--): C46.2 Q4.2 R76.2 | length 7.4
  F.Cu w0.4: v2(-4.93,20.73) -4.61,20.41 -4.61,19.72 Q4.2@-4.37,19.48 ; v2(-4.93,23.52) -4.28,23.52 -4.01,23.79 R76.2@-4.01,24.35 -4.01,24.77 -3.655,25.125 C46.2@-3.655,25.71
  In3.Cu w0.4: v2(-4.93,20.73) v2(-4.93,23.52)
Net-(C47-+): C47.1 L4.1 Q5.3 | length 7.8
  F.Cu w0.6: Q5.3@-9.97,15.59 -9.97,17.02 -9.04,17.95 L4.1@-7.6,17.95
  F.Cu w1: L4.1@-7.6,17.95 -7.6,16.3 -7.185,15.885 C47.1@-7.185,14.48
Net-(C49--): C49.2 Q3.2 R68.2 | length 4.9
  F.Cu w0.5: Q3.2@-7.993,28.537 -7.993,27.443 -7.76,27.21 C49.2@-7.76,26.24 -7.76,25.08 -7.508,24.827 R68.2@-7.508,23.8
Net-(C60-Pad1): C60.1 C63.2 | length 2.2
  F.Cu w0.4: C63.2@-46.715,-8.93 -45.72,-8.93 -45.56,-9.09 C60.1@-44.615,-9.09
Net-(C65-+): C65.1 C67.1 | length 1.3
  F.Cu w0.4: C67.1@-28.25,-12.77 C65.1@-27,-12.77
Net-(C85-+): C85.1 R24.1 R121.1 U12.4 | length 69.5
  F.Cu w0.08: v2(17.21,11.18) 17.23,11.16 U12.4@19.19,11.16 19.54,11.16 v3(19.56,11.14) ; v3(24.44,6.38) R121.1@24.47,6.41
  F.Cu w0.2: R121.1@24.47,6.41 C85.1@25.33,6.41
  F.Cu w0.4: R24.1@5.68,47.29 5.83,47.14 v2(6.54,47.14)
  In1.Cu w0.15: v3(19.56,11.14) 20.59,11.14 20.93,11.48 21.51,11.48 22.36,10.63 24.01,10.63 25.14,9.5 25.14,7.08 v3(24.44,6.38)
  In6.Cu w0.08: v2(6.54,47.14) 5.01,47.14 3.13,49.02 3.13,49.64 4.34,50.85 9.61,50.85 11.14,49.32 11.14,47.66 13.26,45.54 13.26,34.45 14.17,33.54 14.16,33.53 14.16,22.68 13.28,21.8 13.28,20.51 14.18,19.61 14.18,15.8 17.21,12.77 v2(17.21,11.18)
Net-(C85--): C85.2 J7.2 R121.2 U12.5 | length 34.9
  F.Cu w0.08: U12.5@24.34,11.16 26.33,11.16 26.67,11.5 26.67,14.61 v3(26.31,14.97) ; v3(46.18,14.84) 46.6,14.84 46.86,14.58 J7.2@46.86,13.14
  F.Cu w0.15: R121.2@24.44,7.4 24.47,7.37 C85.2@25.33,7.37 25.33,8.5 v3(25.72,8.89)
  In1.Cu w0.08: v3(26.31,14.97) 26.77,14.97 27.03,15.23 36.77,15.23 37.02,14.98 37.92,14.98 38.48,15.54 42.23,15.54 43.11,14.66 45.28,14.66 45.46,14.84 v3(46.18,14.84)
  In1.Cu w0.15: v3(24.41,11.14) 25.16,11.14 25.72,10.58 v3(25.72,8.89)
Net-(C89--): C89.2 J8.18 | length 13.6
  F.Cu w0.08: v11(50.7,6.2) 50.7,5.49 50.74,5.45 J8.18@50.74,3.78
  F.Cu w0.4: C89.2@44.245,1.09 45.12,1.09 v2(45.15,1.06)
  In6.Cu w0.08: v2(45.15,1.06) 45.2,1.11 49.97,1.11 50.71,1.85 50.71,6.19 v11(50.7,6.2)
Net-(C92--): C92.2 F3.1 J13.16 L12.1 RA2.1 RA2.2 RA2.3 RA2.4 | length 214.9
  F.Cu w0.4: v4(73.4,5.28) 73.505,5.175 RA2.4@73.505,3.94 RA2.3@74.305,3.94 ; C92.2@75.03,7.12 75.03,6.74 74.93,6.64 v4(74.93,5.33) 74.305,4.705 RA2.3@74.305,3.94 ; RA2.1@75.905,3.94 RA2.2@75.105,3.94 RA2.3@74.305,3.94
  In3.Cu w0.6: v4(73.4,5.28) 74.88,5.28 v4(74.93,5.33)
  In3.Cu w0.7: v2(19.99,-3.52) 23.71,-3.52 24.11,-3.12 30.75,-3.12 31.12,-2.75 55.44,-2.75 56.82,-4.13 v4(56.82,-4.15) 63.71,-4.15 64.77,-5.21 68.8,-5.21 69.93,-4.08 73.64,-4.08 v4(74.08,-3.64)
  In4.Cu w0.8: v2(-17.47,55.92) -16.99,55.44 -14.75,55.44 -13.21,53.9 -10.83,53.9 v2(-10.77,53.96)
  In5.Cu w1: v2(-12.94,0.83) -12.94,3 -11.99,3.95 -9,3.95 -7.85,2.8 3.62,2.8 6.07,0.35 7.66,0.35 9.29,1.98 10.69,1.98 11.9,0.77 15.29,0.77 15.58,1.06 19.92,1.06 v2(19.96,1.1)
  In6.Cu w0.7: v4(70.79,-19.44) 70.79,-18.65 69.05,-16.91 68.19,-16.91 66.9,-15.62 66.9,-6.76 67.96,-5.7 69.97,-5.7 72.03,-3.64 v4(74.08,-3.64)
  In6.Cu w0.8: v4(73.4,5.28) 74.22,4.46 74.22,4.21 74.2,4.19 74.2,-0.33 73.88,-0.65 73.88,-3.44 v4(74.08,-3.64)
  In6.Cu w1: v2(-12.94,0.83) -12.94,2.79 -11.55,4.18 -11.55,13.59 -12.47,14.51 -12.47,18.45 -11.59,19.33 -11.59,24.15 -7.62,28.12 -7.62,37.13 -6.8,37.95 -6.8,44.68 -10.77,48.65 v2(-10.77,53.96) ; v2(19.96,1.1) 19.99,1.07 v2(19.99,-3.52)
  B.Cu w0.08: L12.1@-19.188,58.548 L12.1@-19.188,58.56 ; J13.16@74.93,9.24 J13.16@74.94,9.25
  B.Cu w0.4: L12.1@-19.188,58.548 -17.47,56.83 v2(-17.47,55.92) ; v4(74.93,5.33) J13.16@74.93,9.24
  B.Cu w0.7: v4(70.79,-19.44) 70.79,-20.81 F3.1@70.84,-20.86
Net-(C129-+): C129.1 C272.1 F4.2 J11.25 J11.26 | length 17.8
  F.Cu w0.3: v4(51.96,-21.51) 52.03,-21.58 54.39,-21.58 56.39,-21.58 v4(56.85,-21.12) 56.76,-21.12 56.57,-20.93 J11.26@54.39,-20.93
  In1.Cu w0.08: v3(51.12,-20.17) 51.12,-20.67 v4(51.96,-21.51)
  B.Cu w0.3: F4.2@54.8,-22.9 55.07,-22.9 v4(56.85,-21.12)
  B.Cu w0.4: v4(51.96,-21.51) 53.35,-22.9 F4.2@54.8,-22.9 55.18,-23.28 55.18,-24.925 C272.1@55.205,-24.95
Net-(C135-+): C135.1 D35.1 D35.3 R200.1 U75.16 | length 9
  F.Cu w0.08: D35.1@7.99,-39.5 D35.1@8.055,-39.435
  F.Cu w0.4: v2(4.68,-38.85) 4.78,-38.95 R200.1@5.47,-38.95 5.47,-39.07 5.835,-39.435 D35.3@6.73,-39.435 D35.1@8.055,-39.435
  F.Cu w0.5: C135.1@7.99,-41.95 D35.1@7.99,-39.5
  In8.Cu w0.08: v2(4.68,-38.85) 4.68,-39.36 4.89,-39.57 v1(4.89,-41.465)
  B.Cu w0.08: U75.16@4.84,-41.44 4.865,-41.44 v1(4.89,-41.465)
Net-(C147-+): C147.1 U48.1 | length 5.2
  In8.Cu w0.08: v1(9.26,46.76) 9.62,46.76 12.56,49.7 v1(12.56,50.395)
Net-(C147--): C15.1 C147.2 R25.1 U47.7 | length 12.4
  F.Cu w0.08: v3(9.14,51.45) 9.14,51.48 C15.1@9.38,51.72
  F.Cu w0.4: v2(7.24,49.24) 7.24,49.53 7.37,49.66 v3(7.37,50.15)
  In1.Cu w0.08: v3(7.37,50.15) 7.7,49.82 8.67,49.82 9.14,50.29 v3(9.14,51.45)
  In8.Cu w0.08: v1(7.51,51.83) 7.53,51.85 12.465,51.85 v1(12.56,51.945)
  B.Cu w0.08: v2(7.24,49.24) 7.24,49.73 7.51,50 v1(7.51,51.83)
Net-(C150-+): C150.1 U4.4 | length 19.7
  F.Cu w0.08: U4.4@1.25,47.54 1.25,45.13 v2(1.33,45.05)
  In8.Cu w0.1: v1(-4.43,51.5) -4.2,51.73 -2.52,51.73 -2.095,51.305 v1(-1.66,51.305)
  In8.Cu w0.2: v1(-5.32,50.75) -5.32,48.77 -6.14,47.95 -6.14,47.35 -5.82,47.03 0.65,47.03 1.33,46.35 v2(1.33,45.05)
  B.Cu w0.15: v1(-5.32,50.75) -4.87,51.2 -4.73,51.2 v1(-4.43,51.5)
Net-(C150--): C150.2 R221.1 R225.1 | length 6.8
  In8.Cu w0.1: v2(-3.52,52.6) -1.915,52.6 v1(-1.66,52.855) -0.945,52.855 -0.68,52.59 1.75,52.59 v1(2.17,52.17)
  B.Cu w0.4: v2(-3.52,52.6) -3.37,52.45 -2.86,52.45 R221.1@-2.85,52.44
Net-(C153-Pad1): C153.1 R37.2 R217.1 | length 15.5
  In1.Cu w0.3: v3(12.74,54.99) 12.74,54.425 13.7,53.465 13.7,53.11 v10(14.05,52.76)
  In8.Cu w0.3: v6(6.82,44.555) 6.82,46.13 8.24,47.55 8.24,47.78 9.94,49.48 10.79,49.48 11.4,50.09 11.61,50.09 12.06,50.54 12.06,50.77 v10(14.05,52.76)
  B.Cu w0.5: R217.1@13.92,53.64 13.91,53.63 13.91,52.9 v10(14.05,52.76)
Net-(C154-+): C154.1 R220.1 R227.1 U47.2 | length 5.7
  In8.Cu w0.1: v1(3.93,57.82) 5.09,57.82 5.23,57.68 v1(7.51,57.68)
  B.Cu w0.4: R220.1@1.88,57.79 R227.1@2.93,57.79 3.9,57.79 v1(3.93,57.82)
Net-(C160--): C160.2 C166.1 R224.1 U4.11 | length 11.4
  F.Cu w0.08: v2(-3.89,51.21) -3.3,50.62 U4.11@-3.3,47.54
  In8.Cu w0.08: v2(-3.89,51.21) -3.46,50.78 -1.25,50.78 v1(-0.46,51.57)
  B.Cu w0.5: C160.2@-4.6,49.355 -4.6,50.5 v2(-3.89,51.21) ; v1(-0.46,51.57) -0.2,51.31 0.875,51.31 C166.1@0.88,51.305
Net-(C162-+): C162.1 R222.2 R225.2 | length 6
  B.Cu w0.08: C162.1@0.25,55.235 0.985,55.235 1.33,54.89 1.33,54.69 2.14,53.88 R225.2@2.14,53.2 R222.2@3.17,53.2
  B.Cu w0.5: v2(-1.11,55.91) -1.11,55.78 -0.565,55.235 C162.1@0.25,55.235
Net-(C163--): C163.2 EM5.3 J1.6 | length 23.4
  In1.Cu w0.08: v3(-23.89,54.75) -23.5,54.36 -23.5,52.89 -21.86,51.25 -12.61,51.25 -12.19,51.67 v2(-12.19,51.98)
  B.Cu w0.08: EM5.3@-12.115,50.35 -12.115,51.425 -12.11,51.43 -12.19,51.51 v2(-12.19,51.98) -12.19,52.9 -11.74,53.35 -9.58,53.35 -9.05,52.82 -9.05,50.92 -8.79,50.66 C163.2@-8.25,50.66
Net-(C164-Pad2): C164.2 R220.2 | length 3.4
  In8.Cu w0.1: v1(1.88,58.81) 2.05,58.64 v1(2.05,56.41)
  B.Cu w0.2: v1(2.05,56.41) 2.05,55.575 C164.2@2.095,55.53
Net-(C167--): C167.2 EM5.4 J1.2 | length 20.4
  In1.Cu w0.08: v3(-19.84,54.75) -19.84,53.6 -17.71,51.47 -13.24,51.47 -12.73,51.98 -12.73,52.07 -12.12,52.68 v2(-9.76,52.68)
  B.Cu w0.08: EM5.4@-11.315,50.35 -11.315,52.405 -11.04,52.68 v2(-9.76,52.68) -9.76,50.94 -9.41,50.59 -9.41,50.12 -8.94,49.65 C167.2@-8.25,49.65
Net-(C168--): C168.2 U3.3 | length 4.6
  F.Cu w0.5: v2(-35.2,57.75) -35.2,59.5 U3.3@-35.15,59.55
  B.Cu w0.5: v2(-35.2,57.75) -35.2,56.11 -34.915,55.825 C168.2@-34.915,55.1
Net-(C170-+): C170.1 EM5.1 J1.5 | length 12.1
  In1.Cu w0.08: v3(-22.89,54.75) -22.41,55.23 -19.14,55.23 -17.23,53.32 v2(-17.11,53.32)
  B.Cu w0.08: v2(-17.11,53.32) -15.97,52.18 C170.1@-14.84,52.18 -14.34,52.18 -13.715,51.555 EM5.1@-13.715,50.35
Net-(C171-+): C171.1 J2.6 L16.1 | length 4.7
  F.Cu w0.5: v2(-30.65,50.42) -30.13,50.94 J2.6@-30.13,51.83
  B.Cu w0.5: L16.1@-30.723,51.94 -30.65,51.868 -30.65,51.46 ; v2(-30.65,50.42) -30.65,51.46 ; C171.1@-29.14,51.47 -30.37,51.47 -30.38,51.46 -30.65,51.46
Net-(C176-+): C176.1 C188.1 J2.4 L9.1 R234.2 | length 10.3
  F.Cu w0.5: v2(-31.35,50.43) -31.35,50.77 -31.13,50.99 J2.4@-31.13,51.83
  B.Cu w0.08: C176.1@-32.985,46.93 C176.1@-32.97,46.915
  B.Cu w0.3: C188.1@-33.53,51.61 -33.53,51.45 -33.12,51.04 -31.96,51.04 v2(-31.35,50.43)
  B.Cu w0.5: L9.1@-33.148,45.41 -33.148,46.143 -32.97,46.32 C176.1@-32.97,46.915 ; C176.1@-32.985,46.93 -32.985,47.775 -32.52,48.24 -32.52,49.14 -32.18,49.48 R234.2@-31.66,49.48 -31.66,50.12 v2(-31.35,50.43)
Net-(C177--): C177.2 J2.27 L18.1 | length 9.9
  F.Cu w0.5: J2.27@-19.58,49.03 -19.58,47.58 v2(-19.5,47.5)
  In8.Cu w0.08: v2(-19.5,47.5) -19.48,47.52 -19.48,48.92 -18.55,49.85 -18.55,53.667 v1(-19.062,54.18)
  B.Cu w0.4: C177.2@-19.64,48.45 -19.64,47.64 v2(-19.5,47.5)
Net-(C189--): C189.2 J2.2 L14.1 | length 7
  F.Cu w0.08: v2(-34.34,53.23) v2@-34.33,53.24
  F.Cu w0.5: v2@-34.33,53.24 -32.49,53.24 -32.13,52.88 J2.2@-32.13,51.83
  B.Cu w0.08: C189.2@-35.03,52.56 C189.2@-35.01,52.56
  B.Cu w0.4: L14.1@-37.31,51.85 -36.3,51.85 -35.65,52.5 -35.09,52.5 C189.2@-35.03,52.56
  B.Cu w0.5: C189.2@-35.01,52.56 v2(-34.34,53.23)
Net-(C192-+): C192.1 J2.26 L11.2 | length 4.3
  F.Cu w0.5: J2.26@-20.08,51.83 -20.08,50.35 v2(-20.02,50.29)
  B.Cu w0.5: v2(-20.02,50.29) -20.02,51.46 C192.1@-20.01,51.47 -18.517,51.47 L11.2@-18.447,51.4
Net-(C193-+): C193.1 J2.5 R234.1 | length 3.8
  F.Cu w0.5: v2(-30.69,47.38) -30.63,47.44 J2.5@-30.63,49.03
  B.Cu w0.5: R234.1@-31.66,48.46 -31.25,48.46 -31.21,48.5 C193.1@-30.69,48.5 v2(-30.69,47.38)
Net-(C195--): C195.2 J2.29 L17.2 | length 4.5
  F.Cu w0.5: J2.29@-18.58,49.03 -18.58,47.6 v2(-18.48,47.5)
  B.Cu w0.08: -17.824,47.914 -17.824,47.954
  B.Cu w0.4: C195.2@-18.34,48.47 -17.824,47.954
  B.Cu w0.5: v2(-18.48,47.5) -18.237,47.5 -17.824,47.914 L17.2@-16.917,48.82
Net-(C197--): C197.2 U3.5 | length 2
  F.Cu w0.5: v2(-33.86,57.74) -33.86,56.71 U3.5@-33.85,56.7
  B.Cu w0.5: v2(-33.86,57.74) -33.715,57.885 C197.2@-33.715,58.63
Net-(C198-+): C198.1 J1.4 L12.2 | length 5.2
  F.Cu w0.5: v2(-22.08,57.39) -22.08,56.5 -21.89,56.31 J1.4@-21.89,54.75
  B.Cu w0.4: C198.1@-22.16,56.45 -22.16,56.9 -22.08,56.98 v2(-22.08,57.39)
  B.Cu w0.5: v2(-22.08,57.39) -22.06,57.39 -21.312,58.138 L12.2@-21.312,58.56
Net-(C199-+): C199.1 EM5.2 J1.3 | length 18.2
  F.Cu w0.08: J1.3@-20.84,54.75 -20.84,53.54 -20.2,52.9 -16.42,52.9 -15.95,52.43 -14.77,52.43 v2(-14.31,52.89)
  In1.Cu w0.08: v2(-14.31,52.89) -14.33,52.91 -14.33,57.61 v10(-14.29,57.65)
  B.Cu w0.08: C199.1@-14.68,56.53 -14.15,56.53 -13.94,56.74 -13.94,57.3 v10(-14.29,57.65) ; v2(-14.31,52.89) -13.7,52.28 -13.7,52 -12.915,51.215 EM5.2@-12.915,50.35
Net-(C200--): C200.2 R241.1 U3.8 | length 12.8
  B.Cu w0.08: v2(-49.76,54.9) v2@-49.64,54.78
  B.Cu w0.5: v2(-49.76,54.9) -49.76,54.05 -49.24,53.53 R241.1@-49.24,52.88 -47.88,52.88 -47.19,52.19 -44.66,52.19 -44.65,52.18 -44.33,52.18 -42.77,53.74 C200.2@-42.77,54.435 -42.8,54.465 U3.8@-42.8,56.7
Net-(C201-+): C201.1 C202.2 R238.1 U3.6 | length 7.7
  F.Cu w0.5: v2(-37.28,58.4) -36.42,57.54 -36.42,56.72 U3.6@-36.4,56.7
  B.Cu w0.08: -39.41,58.33 -39.405,58.335
  B.Cu w0.5: R238.1@-40.415,58.58 -40.405,58.59 -39.67,58.59 -39.41,58.33 ; -39.405,58.335 C202.2@-38.3,58.335 -37.345,58.335 v2(-37.28,58.4) ; C201.1@-36.855,54.57 -36.69,54.735 -36.69,56.41 U3.6@-36.4,56.7
Net-(C206--): C45.1 C206.2 C210.2 L6.1 U51.M11 | length 19.3
  F.Cu w0.5: v2(-14.51,33.43) -13.84,34.1 -13.07,34.1 ; v2(-11.48,37.29) -11.86,37.29 -12.33,36.82 -12.33,35.28 -13.07,34.54 -13.07,34.1 ; C45.1@-10.14,33.945 -11.855,33.945 -12.01,34.1 -13.07,34.1
  B.Cu w0.08: v2@-14.54,33.43 v2(-14.51,33.43) ; v2(-11.48,37.29) v2@-11.365,37.175 ; L6.1@-7.32,39.592 L6.1@-7.21,39.703
  B.Cu w0.4: U51.M11@-15.13,32.84 -15.11,32.84 -14.54,33.41 v2@-14.54,33.43
  B.Cu w0.5: v2(-11.48,37.29) -10.165,37.29 C210.2@-10.05,37.175 -10.05,37.98 -10.37,38.3 -10.37,38.97 -9.88,39.46 -8.24,39.46 -7.997,39.703 L6.1@-7.21,39.703 ; C206.2@-7.32,37.165 -7.32,38.88 L6.1@-7.32,39.592
Net-(C207-+): C207.1 R71.2 | length 3.4
  F.Cu w0.2: R71.2@10.46,34.41 11.09,34.41 11.42,34.74 v2(11.42,36.11)
  B.Cu w0.4: v2(11.42,36.11) 11.465,36.155 C207.1@12.35,36.155
Net-(C213-Pad2): C213.2 C214.2 R250.1 | length 5.2
  B.Cu w0.5: C213.2@4.86,32.75 4.86,31.92 5.23,31.55 R250.1@5.23,30.652 6.747,30.652 7.31,30.09 C214.2@7.31,29.455
Net-(C224--): C224.2 D47.1 R281.1 U55.2 | length 7.2
  B.Cu w0.08: R281.1@-53.59,28.76 -51.798,28.76 D47.1@-51.657,28.62 -51.657,27.808 -51.375,27.525 C224.2@-51.375,26.86 -51.375,26.265 -50.82,25.71 U55.2@-50.82,25.09
  B.Cu w0.2: v2(-50.86,23.82) -50.82,23.86 U55.2@-50.82,25.09
Net-(C225-+): C225.1 D45.3 D46.3 D49.3 Q30.1 R276.2 | length 13.8
  In8.Cu w0.08: v1(-47.58,30.72) -47.58,33.03 -47.51,33.1 v1(-47.51,33.455) ; v1(-45.49,27.6) v1@-45.49,31.66
  B.Cu w0.08: Q30.1@-49.48,34.19 -48.89,34.19 -48.155,33.455 v1(-47.51,33.455) ; v1(-47.58,30.72) -47.58,30.22 -46.96,29.6 D49.3@-45.87,29.6 ; D46.3@-45.87,31.55 D46.3@-45.79,31.63
  B.Cu w0.5: D46.3@-45.79,31.63 R276.2@-45.79,33.73
  other v1: -45.48,29.62 -45.48,31.64
Net-(C225--): C29.2 C225.2 Q30.2 | length 4.1
  F.Cu w0.5: v2(-48.44,31.88) -48.05,31.88 -47.81,31.64 C29.2@-47.81,31.25
  B.Cu w0.5: Q30.2@-49.48,33.19 -48.99,33.19 -48.68,32.88 -48.68,32.12 v2(-48.44,31.88) -48.415,31.905 C225.2@-47.51,31.905
Net-(C227--): C227.2 D9.2 Q31.3 R79.1 R275.1 R284.1 U63.10 U63.16 | length 52.2
  F.Cu w0.4: D9.2@-47.535,-0.23 -46.68,-0.23 -46.53,-0.08 R79.1@-45.57,-0.08 -45.57,-0.99 v2(-46.25,-1.67)
  In4.Cu w0.6: v2(-40.05,18.11) -40.46,18.11 -41.36,17.21 -41.36,15.68 -40.6,14.92 v2(-39.93,14.92) -39.75,14.74 -38.99,14.74 -38.84,14.59 -37.85,14.59 -37.44,14.18 -37.44,-1.38 -37.23,-1.59 v2(-36.85,-1.59)
  In5.Cu w0.6: v2(-46.25,-1.67) -46.25,-0.63 -45.57,0.05 -39.36,0.05 -37.72,-1.59 v2(-36.85,-1.59)
  B.Cu w0.4: v2(-46.25,-1.67) -46.06,-1.48 U63.16@-46.06,1.36 ; v2(-39.93,14.92) -39.79,14.78 C227.2@-38.95,14.78 ; U63.10@-38.435,1.31 -38.435,-0.865 -37.71,-1.59 v2(-36.85,-1.59)
  B.Cu w0.5: R275.1@-41.27,17.29 -41.27,17.61 -40.77,18.11 v2(-40.05,18.11) -39.51,18.11 -39.21,17.81 Q31.3@-39.21,17.17
  B.Cu w0.6: R284.1@-41.217,15.1 -41.037,14.92 v2(-39.93,14.92)
Net-(C228-+): C228.1 Q30.3 R282.1 U54.1 | length 5.1
  In8.Cu w0.08: v1(-50.78,33.69) -49.86,34.61 v1(-49.86,35.51)
  B.Cu w0.08: v1(-49.86,35.51) -49.81,35.56 U54.1@-48.055,35.56 ; R282.1@-49.86,36.51 R282.1@-49.83,36.54
  B.Cu w0.2: v1(-49.86,35.51) R282.1@-49.86,36.51
Net-(C229--): C229.2 R235.1 U54.13 | length 9.7
  In8.Cu w0.08: v1(-45.1,38.64) -43.69,38.64 -42.56,37.51 -41.44,37.51 -41.15,37.22 -41.15,36.62 ; v1(-42.33,36.21) -41.43,36.21 -41.15,36.49 -41.15,36.62 ; v1(-40.125,36.62) -41.15,36.62
  B.Cu w0.08: v1(-45.1,38.64) R235.1@-45.1,40.71 ; v1(-42.33,36.21) -42.29,36.21 U54.13@-42.27,36.23
Net-(C230--): C230.2 C257.2 U63.2 X4.2 | length 16.6
  B.Cu w0.08: X4.2@-51.85,10.99 X4.2@-51.66,10.8
  B.Cu w0.4: X4.2@-51.85,10.99 C230.2@-51.85,13.05 ; X4.2@-51.66,10.8 -48.46,10.8 -47.76,10.1 C257.2@-47.76,5 -45.07,5 -44.785,5.285 U63.2@-44.785,7.16
Net-(C232--): C232.2 C258.2 C259.2 C260.2 R284.2 U63.4 U63.13 | length 19.7
  B.Cu w0.08: R284.2@-43.125,15.018 R284.2@-43.042,15.1
  B.Cu w0.2: U63.13@-42.26,1.31 -42.26,-0.86 -41.72,-1.4 C258.2@-41.72,-1.82
  B.Cu w0.4: R284.2@-43.125,15.018 C232.2@-43.125,12.91 -43.89,12.91 -44.29,12.51 -44.29,11.49 -43.76,10.96 C259.2@-42.545,10.96 -42.24,10.655 C260.2@-42.24,9.81 -42.26,9.79 U63.4@-42.26,7.16 U63.13@-42.26,1.31
Net-(C233-+): C233.1 Q29.1 U53.5 | length 44.4
  In8.Cu w0.08: v1(-51.93,17.505) -49.98,15.555 -49.98,13.9 -50.67,13.21 -50.67,-1.53 -51.92,-2.78 -51.92,-11.55 -48.61,-14.86 -48.61,-20.42 -48.62,-20.43 v2(-48.62,-20.47)
  B.Cu w0.5: v1(-51.93,17.505) -50.095,17.505 U53.5@-49.97,17.63 -49.48,18.12 Q29.1@-49.48,18.9
Net-(C234--): C234.2 Q29.2 R285.1 U53.2 | length 8.2
  B.Cu w0.08: Q29.2@-49.48,20.8 -49.18,20.8 -48.64,20.26 -48.64,19.44 -47.94,18.74 R285.1@-46.07,18.74
  B.Cu w0.5: U53.2@-47.65,16.68 -46.68,16.68 -46.32,17.04 C234.2@-46.07,17.04 R285.1@-46.07,18.74